# Altium PCB 2_RPi.PcbDoc (part 2 of 2)
Units mm, origin at the board's own origin, x right, y up, seen from the top; angles counter-clockwise.
Board outline 85.1 x 56 mm, 4 copper layers (Top Copper, Signal Layer 1, Signal Layer 2, Bottom Copper), stack 1.572 mm thick; 87 components, 122 nets, 420 pads, 307 vias.
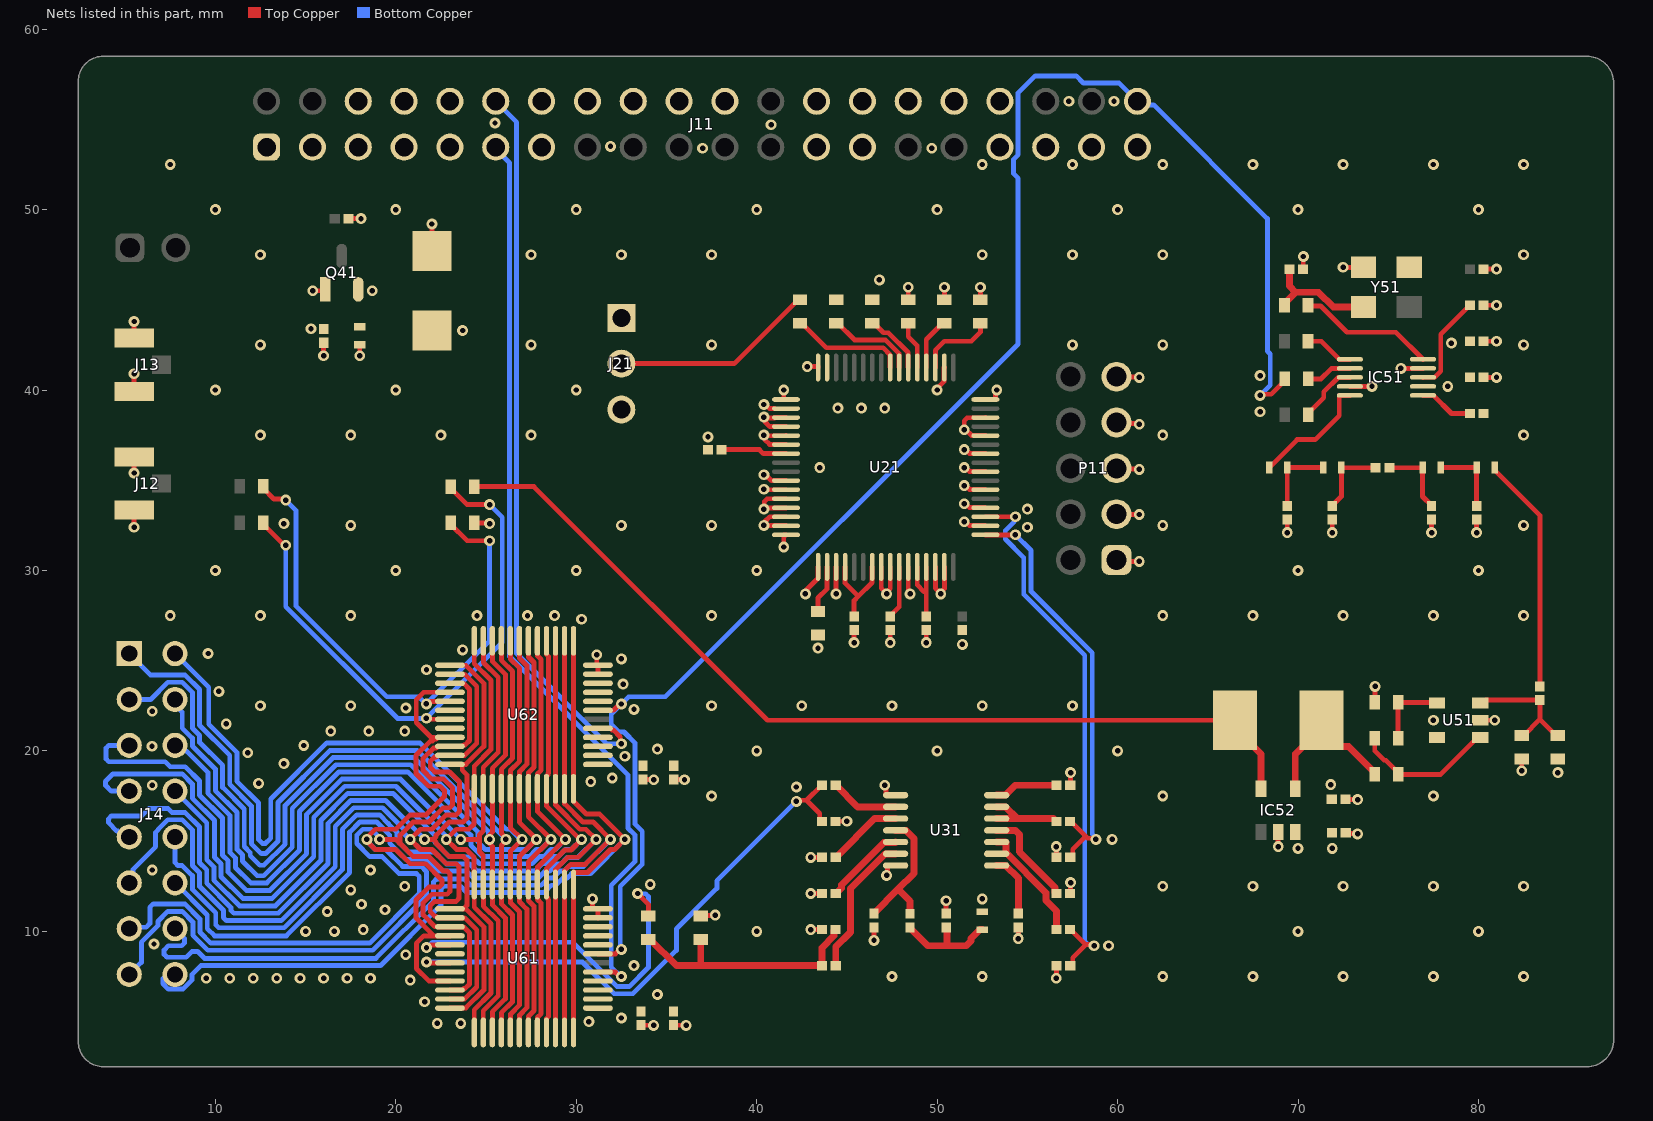
[diagram p4: the nets of this part, all layers, seen from the top]

## Via types
v1: diameter 0.6, hole 0.3, Top Copper to Bottom Copper, tented both sides, 307 vias

## Nets (pads, with @x,y where several pads share a name; then routed paths per layer and width w, separated by ;. In a path a pad name is that pad's centre, name@x,y a point inside that pad or via, vN(x,y) a via of type N, cw(c..) or ccw(c..) an arc to the next point about the centre after c; other vN are vias at no path point) (continued)
GND: C201.1 C202.1 C203.1 C301.1 C302.1 C304.1 C305.1 C306.2 C307.2 C308.1 C309.1 C401.2 C402.2 C403.1 C502.1 C503.1 C504.1 C505.1 C506.1 C507.2 C509.2 C510.1 C511.2 C513.2 C514.2 C601.2 C602.1 C603.2 C604.1 D41.2 IC51.4 IC51.9 IC52.2 J11.6 J11.9 J11.14 J11.20 J11.25 J11.30 J11.34 J11.39 J12.2 J12.3 J13.2 J13.3 J21.3 P11.1 P11.3 P11.5 P11.7 P11.9 Q41.1 R104.2 R105.1 R205.2 R206.2 R207.2 R302.1 R305.1 R306.2 R505.1 R508.1 U21.2 U21.16 U21.17 U21.18 U21.19 U21.20 U21.21 U21.22 U21.26 U21.27 U21.28 U21.29 U21.30 U21.31 U21.32 U21.33 U21.35 U21.40 U21.41 U21.43 U21.46 U21.47 U21.50 U21.52 U21.54 U21.56 U21.58 U21.60 U21.62 U21.64 U31.1 U31.7 U51.2 U61.23 U61.24 U62.23 U62.24 Y51.2 | length 88.9
  Top Copper w0.27: J12.3@5.499,33.343 5.5,33.342 v1(5.5,32.4) ; J12.2@5.499,36.293 J12.2@5.499,36.293 v1(5.5,35.4) ; J13.3@5.5,39.925 v1(5.5,40.9) ; J13.2@5.5,42.875 v1(5.5,43.8) ; v1(15.4,45.5) 16.012,45.5 Q41.1@16.085,45.573 ; v1(16,41.9) C402.2@16,42.62 ; C401.2@17.38,49.5 C401.2@17.38,49.5 18,49.501 v1@18.002,49.503 ; v1(18,41.9) C403.1@18,42.5 ; D41.2@22,47.7 v1(22,49.2) ; R105.1@24.35,32.65 24.375,32.625 25.175,32.625 v1(25.2,32.6) ; v1(30.9,11.8) 30.9,11.264 30.914,11.25 U61.24@31.2,11.25 U61.23@31.2,10.75 ; v1(31.138,25.325) 31.138,24.764 31.152,24.75 U62.24@31.2,24.75 U62.23@31.2,24.25 ; C604.1@33.59,4.81 33.6,4.8 34.28,4.8 v1(34.29,4.79) ; C602.1@33.7,18.42 33.71,18.41 34.29,18.41 v1(34.3,18.4) ; C603.2@35.39,4.81 35.4,4.8 36.08,4.8 v1(36.09,4.79) ; C601.2@35.4,18.42 35.41,18.41 35.99,18.41 v1(36,18.4) ; R104.2@36.9,10.85 36.925,10.875 37.675,10.875 v1(37.7,10.9) ; v1(40.4,34.5) 40.425,34.475 U21.27@41.625,34.475 ; v1(40.4,35.3) 40.489,35.3 40.804,34.985 41.615,34.985 U21.26@41.625,34.975 ; v1(40.4,39.2) 40.489,39.2 40.704,38.985 U21.18@40.985,38.985 ; v1(41.5,31.3) 41.5,31.965 41.51,31.975 U21.32@41.625,31.975 ; v1(41.5,40) 41.5,39.485 41.51,39.475 U21.17@41.625,39.475 ; U21.31@41.625,32.475 41.615,32.485 40.415,32.485 v1(40.4,32.5) 40.463,32.563 40.463,32.713 40.725,32.975 U21.30@41.625,32.975 ; U21.29@41.625,33.475 41.615,33.465 40.554,33.465 40.489,33.4 v1(40.4,33.4) 40.422,33.422 40.422,33.817 40.581,33.975 U21.28@41.625,33.975 ; U21.22@41.625,36.975 41.615,36.985 40.715,36.985 40.445,37.255 40.445,37.455 v1(40.4,37.5) 40.435,37.465 41.615,37.465 U21.21@41.625,37.475 ; U21.20@41.625,37.975 40.725,37.975 40.445,38.255 40.445,38.455 v1(40.4,38.5) 40.455,38.445 40.985,38.445 40.985,38.465 40.995,38.475 U21.19@41.625,38.475 ; v1(42.7,28.7) 42.763,28.763 42.763,28.933 43.4,29.57 U21.33@43.4,30.2 ; v1(42.8,41.3) 43.39,41.3 43.4,41.29 U21.16@43.4,41.25 ; v1(43,10.1) R306.2@43.625,10.1 ; v1(43,12.1) C307.2@43.62,12.1 ; v1(43,14.1) C306.2@43.62,14.1 ; R302.1@44.375,16.1 v1(45,16.1) ; v1(44.4,28.7) U21.35@44.4,30.2 ; v1(45.4,26) C201.1@45.4,26.7 ; v1(46.5,9.5) C302.1@46.5,10.22 ; U21.40@46.9,30.2 46.9,29.02 v1@47.2,28.72 ; v1(47.1,18.1) 47.163,18.037 47.163,17.587 47.2,17.55 U31.1@47.7,17.55 ; v1(47.2,13.1) 47.255,13.155 47.255,13.613 47.292,13.65 U31.7@47.7,13.65 ; v1(47.2,28.7) v1@47.2,28.72 ; v1(47.4,26) C203.1@47.4,26.7 ; U21.41@47.4,30.2 47.4,28.989 47.2,28.789 v1@47.2,28.72 ; U21.43@48.4,30.2 48.4,28.889 48.5,28.789 v1(48.5,28.7) ; R205.2@48.4,45 v1(48.4,45.7) ; v1(49.4,26) C202.1@49.4,26.7 ; U21.46@49.9,30.2 49.9,29.02 v1@50.2,28.72 ; v1(50,40) 50,40.089 50.39,40.479 50.39,41.24 U21.2@50.4,41.25 ; v1(50.2,28.7) v1@50.2,28.72 ; U21.47@50.4,30.2 50.4,28.989 50.2,28.789 v1@50.2,28.72 ; R206.2@50.4,45 v1(50.4,45.7) ; C301.1@50.5,10.98 v1(50.5,11.7) ; v1(51.5,32.7) 51.589,32.7 51.804,32.485 52.665,32.485 U21.50@52.675,32.475 ; v1(51.5,33.7) 51.589,33.7 51.804,33.485 52.665,33.485 U21.52@52.675,33.475 ; v1(51.5,34.7) 51.589,34.7 51.804,34.485 52.665,34.485 U21.54@52.675,34.475 ; v1(51.5,35.7) 51.589,35.7 51.804,35.485 52.665,35.485 U21.56@52.675,35.475 ; v1(51.5,36.7) 51.589,36.7 51.804,36.485 52.665,36.485 U21.58@52.675,36.475 ; R207.2@52.4,45 v1(52.4,45.7) ; U21.60@52.675,37.475 52.665,37.485 51.904,37.485 51.589,37.8 v1(51.5,37.8) 51.5,38.3 51.665,38.465 52.665,38.465 U21.62@52.675,38.475 ; U21.64@52.675,39.475 53.235,39.475 53.245,39.485 53.245,39.945 v1(53.3,40) ; v1(54.5,9.6) C309.1@54.5,10.22 ; v1(56.6,7.4) 56.61,7.41 56.61,8.09 C308.1@56.62,8.1 ; v1(56.6,14.7) 56.61,14.69 56.61,14.11 C305.1@56.62,14.1 ; R305.1@57.375,12.1 57.387,12.113 57.387,12.687 v1(57.4,12.7) ; C304.1@57.38,18.1 57.39,18.11 57.39,18.79 v1(57.4,18.8) ; P11.1@59.94,30.58 60.02,30.5 v1(61.2,30.5) ; P11.3@59.94,33.12 59.95,33.11 61.19,33.11 v1(61.2,33.1) ; P11.5@59.94,35.66 59.97,35.63 61.17,35.63 v1(61.2,35.6) ; P11.7@59.94,38.2 59.99,38.15 61.15,38.15 v1(61.2,38.1) ; P11.9@59.94,40.74 59.96,40.72 61.18,40.72 v1(61.2,40.7) ; v1(68.9,14.7) IC52.2@68.9,15.5 ; v1(69.4,32.1) C507.2@69.4,32.82 ; C506.1@70.28,46.7 70.29,46.71 70.29,47.39 v1(70.3,47.4) ; v1(71.9,32.1) C509.2@71.9,32.82 ; v1(72.5,46.8) Y51.2@73.63,46.8 ; C513.2@72.628,17.322 72.639,17.311 73.289,17.311 v1(73.3,17.3) ; C514.2@72.645,15.465 72.678,15.433 73.267,15.433 v1(73.3,15.4) ; IC51.9@72.875,40.2 v1(74.1,40.2) ; R505.1@74.25,22.7 74.275,22.725 v1(74.275,23.575) ; v1(75.7,41.2) IC51.4@76.925,41.2 ; v1(77.4,32.1) C510.1@77.4,32.82 ; v1(79.9,32.1) C511.2@79.9,32.82 ; U51.2@80.1,21.7 v1(80.9,21.7) ; C503.1@80.28,40.7 v1(81,40.7) ; C504.1@80.28,42.7 v1(81,42.7) ; C502.1@80.28,44.7 v1(81,44.7) ; C505.1@80.28,46.7 v1(81,46.7) ; v1(82.4,18.9) R508.1@82.4,19.55
  other v1: 22.3,4.9 23.6,4.9 30.7,5 21.6,6.1 20.8,7.3 9.5,7.4 10.8,7.4 12.1,7.4 13.4,7.4 14.7,7.4 16,7.4 17.3,7.4 18.6,7.4 47.5,7.5 52.5,7.5 62.5,7.5 67.5,7.5 72.5,7.5 77.5,7.5 82.5,7.5 33.2,8.1 20.554,8.706 59.5,9.2 6.6,9.3 15,10 16.6,10 18.2,10.1 16.2,11.1 19.4,11.2 17.5,12.3 20.5,12.5 62.5,12.5 67.5,12.5 72.5,12.5 77.5,12.5 82.5,12.5 34.1,12.6 6.5,13.4 18.6,13.4 59.7,15.1 37.5,17.5 62.5,17.5 77.5,17.5 42.2,18 6.5,18.1 12.4,18.2 30.8,18.3 13.8,19.3 32.7,19.7 11.8,19.9 6.488,20.254 14.9,20.3 16.4,21.1 18.5,21.1 20.5,21.1 10.6,21.5 6.5,22.2 33.2,22.3 20.557,22.38 12.5,22.5 17.5,22.5 37.5,22.5 42.5,22.5 47.5,22.5 52.5,22.5 57.5,22.5 10.2,23.3 32.6,23.7 21.7,24.5 32.5,25.1 9.6,25.4 23.7,25.6 30.3,27.3 7.5,27.5 12.5,27.5 17.5,27.5 24.5,27.5 27.3,27.5 28.8,27.5 37.5,27.5 62.5,27.5 67.5,27.5 72.5,27.5 77.5,27.5 82.5,27.5 55,32.4 17.5,32.5 32.5,32.5 37.5,32.5 62.5,32.5 82.5,32.5 13.8,32.6 55,33.4 43.5,35.7 12.5,37.5 17.5,37.5 22.5,37.5 27.5,37.5 62.5,37.5 82.5,37.5 67.9,38.8 44.5,39 45.8,39 47.1,39 67.9,40.8 12.5,42.5 27.5,42.5 37.5,42.5 57.5,42.5 62.5,42.5 82.5,42.5 12.5,47.5 27.5,47.5 32.5,47.5 37.5,47.5 52.5,47.5 57.5,47.5 62.5,47.5 82.5,47.5 18.074,49.503 7.5,52.5 52.5,52.5 57.5,52.5 62.5,52.5 67.5,52.5 72.5,52.5 77.5,52.5 82.5,52.5 37,53.4 49.7,53.4 31.9,53.5 40.8,54.7 25.5,54.8 57.3,56 59.8,56
MUX_SCLK: J11.40 R502.1 U61.19 U62.19 | length 91.9
  Top Copper w0.27: U61.19@31.2,8.75 31.206,8.756 32.166,8.756 32.411,9 v1(32.5,9) ; U62.19@31.2,22.25 31.206,22.256 32.066,22.256 32.411,22.6 v1(32.5,22.6) ; v1(67.9,39.7) 67.963,39.763 68.512,39.763 69.267,40.518 R502.1@69.267,40.618
  Bottom Copper w0.27: v1(32.5,9) 32.441,9.059 32.441,12.497 33.659,13.715 33.659,15.541 33.262,15.938 33.262,20.433 32.645,21.05 32.355,21.05 31.938,21.467 31.938,22.038 32.9,23 34.944,23 54.492,42.548 54.492,51.736 54.236,51.991 54.236,52.785 54.492,53.041 54.492,56.465 55.436,57.409 57.712,57.409 58.109,57.012 60.088,57.012 J11.40@61.1,56 61.297,55.803 61.997,55.803 68.3,49.5 68.3,42.16 68.462,41.998 68.462,40.262 v1(67.9,39.7)
N_IN: R105.2 R106.2 U62.41 | length 31.6
  Top Copper w0.27: R106.2@12.655,34.656 12.655,34.556 13.248,33.963 13.837,33.963 v1(13.9,33.9) ; v1(21.694,22.606) 21.784,22.606 21.922,22.744 22.994,22.744 U62.41@23,22.75 ; R105.2@23.05,32.55 23.95,31.65 v1(25.2,31.65)
  Bottom Copper w0.27: v1(13.9,33.9) 14.462,33.338 14.462,31.633 14.462,31.167 14.462,28.038 19.5,23 21.271,23 21.665,22.606 v1(21.694,22.606) 25.2,26.111 v1(25.2,31.65)
N_OUT: R103.1 U61.41 | length 21.3
  Top Copper w0.27: v1(21.7,9.1) 21.789,9.1 21.934,9.244 22.994,9.244 U61.41@23,9.25 ; v1(33.4,12.1) 34,11.5 R103.1@34,10.85
  Bottom Copper w0.27: v1(21.7,9.1) 21.723,9.1 22.023,9.4 29.805,9.4 32.267,6.938 32.938,6.938 34,8 34,11.927 33.842,12.085 33.415,12.085 v1(33.4,12.1)
NetC301_2: C301.2 L301.1 R301.2 | length 5.9
  Top Copper w0.381: R301.2@48.502,10.223 R301.2@48.5,10.225 48.5,10.2 49.5,9.2 50.55,9.2 ; C301.2@50.5,10.22 50.55,10.17 50.55,9.2 ; L301.1@52.5,10.1 52.371,10.1 51.869,9.598 51.869,9.469 51.6,9.2 50.55,9.2
NetC302_2: C302.2 R301.1 U31.4 | length 7.9
  Top Copper w0.381: C302.2@46.5,10.98 46.5,11 47.836,12.336 ; U31.4@47.7,15.6 47.715,15.585 48.287,15.585 48.717,15.154 48.717,13.218 47.836,12.336 ; R301.1@48.5,10.975 48.5,11.671 47.836,12.336
NetC303_2: C303.2 U31.2 | length 3.8
  Top Copper w0.381: C303.2@44.38,18.1 44.4,18.1 45.6,16.9 U31.2@47.7,16.9
NetC304_2: C304.2 U31.14 | length 3.5
  Top Copper w0.381: U31.14@53.3,17.55 53.794,17.55 54.344,18.1 C304.2@56.62,18.1
NetC306_1: C306.1 U31.3 | length 4.2
  Top Copper w0.381: C306.1@44.38,14.1 44.4,14.1 45.5,15.2 45.5,15.22 46.53,16.25 U31.3@47.7,16.25
NetC307_1: C307.1 U31.5 | length 4.6
  Top Copper w0.381: C307.1@44.38,12.1 44.4,12.1 44.692,12.392 44.692,12.582 47.045,14.935 47.684,14.935 U31.5@47.7,14.95
NetC309_2: C309.2 U31.8 | length 3.5
  Top Copper w0.381: U31.8@53.3,13.65 53.794,13.65 54.5,12.944 C309.2@54.5,10.98
NetC310_1: C310.1 U31.6 | length 7.9
  Top Copper w0.381: C310.1@44.38,8.1 44.38,9.131 45.2,9.951 45.2,12.372 47.113,14.285 47.684,14.285 U31.6@47.7,14.3
NetC310_2: C310.2 R103.2 R104.1 R306.1 | length 14
  Top Copper w0.381: R103.2@34,9.55 34.1,9.55 35.55,8.1 36.9,8.1 ; R104.1@36.9,9.55 36.9,8.1 ; R306.1@44.375,10.1 44.35,10.1 44.29,10.041 44.29,9.76 43.62,9.089 C310.2@43.62,8.1 36.9,8.1
NetC501_2: C501.2 IC51.1 | length 3
  Top Copper w0.27: IC51.1@76.925,39.7 77.505,39.7 78.505,38.7 C501.2@79.52,38.7
NetC502_2: C502.2 IC51.3 | length 5.5
  Top Copper w0.27: IC51.3@76.925,40.7 76.935,40.71 77.582,40.71 77.912,41.04 77.912,43.092 79.375,44.555 79.375,44.575 79.5,44.7 C502.2@79.52,44.7
NetC506_2: C506.2 R504.1 Y51.3 | length 6.5
  Top Copper w0.381: R504.1@69.25,44.7 69.25,44.8 69.867,45.418 ; C506.2@69.52,46.7 69.52,45.765 69.867,45.418 ; Y51.3@73.63,44.6 71.953,44.6 71.135,45.418 69.867,45.418
NetC507_1: C507.1 L501.1 L502.1 | length 4.1
  Top Copper w0.27: C507.1@69.4,33.58 L501.1@69.4,35.7 L502.1@71.4,35.7
NetC508_1: C508.1 C510.2 L503.1 | length 4.2
  Top Copper w0.27: C508.1@75.061,35.691 75.065,35.695 76.895,35.695 L503.1@76.9,35.7 76.9,34.1 77.4,33.6 C510.2@77.4,33.58
NetC508_2: C508.2 C509.1 L502.2 | length 4.2
  Top Copper w0.27: C509.1@71.9,33.58 71.9,33.6 72.4,34.1 L502.2@72.4,35.7 72.405,35.695 74.296,35.695 C508.2@74.301,35.691
NetC511_1: C511.1 L503.2 L504.1 | length 4.1
  Top Copper w0.27: L503.2@77.9,35.7 L504.1@79.9,35.7 C511.1@79.9,33.58
NetC512_1: C512.1 R507.1 R508.2 U51.3 | length 7.2
  Top Copper w0.27: U51.3@80.1,22.65 80.25,22.65 80.42,22.82 C512.1@83.4,22.82 83.4,21.75 ; R508.2@82.4,20.85 82.5,20.85 83.4,21.75 ; R507.1@84.4,20.85 84.3,20.85 83.4,21.75
NetC512_2: C512.2 L504.2 | length 13.2
  Top Copper w0.27: L504.2@80.9,35.7 80.9,35.55 83.4,33.05 C512.2@83.4,23.58
NetIC51_5: IC51.5 R504.2 | length 7.6
  Top Copper w0.27: R504.2@70.55,44.7 70.592,44.658 71.255,44.658 72.713,43.2 75.425,43.2 IC51.5@76.925,41.7
NetIC51_6: IC51.6 R503.2 | length 2.7
  Top Copper w0.27: R503.2@70.55,42.7 71.295,42.7 72.295,41.7 IC51.6@72.875,41.7
NetIC51_7: IC51.7 R502.2 | length 2.5
  Top Copper w0.27: R502.2@70.567,40.618 71.272,40.618 71.844,41.19 72.865,41.19 IC51.7@72.875,41.2
NetIC51_8: IC51.8 R501.2 | length 3.4
  Top Copper w0.27: R501.2@70.567,38.618 70.567,38.718 71.423,39.575 71.423,39.895 72.218,40.69 72.865,40.69 IC51.8@72.875,40.7
NetIC51_10: IC51.10 L501.2 | length 6.9
  Top Copper w0.27: L501.2@68.4,35.85 L501.2@68.4,35.7 69.952,37.252 70.952,37.252 72.285,38.585 72.285,39.69 72.295,39.7 IC51.10@72.875,39.7
NetIC52_4: IC52.4 R509.2 RS51.1 | length 8.5
  Top Copper w0.381: IC52.4@69.85,17.9 69.85,19.825 RS51.1@71.3,21.275 ; RS51.1@71.3,21.7 RS51.1@71.3,21.275 ; R509.2@74.25,18.7 74.25,18.8 72.81,20.24 72.335,20.24 RS51.1@71.3,21.275
NetIC52_5: IC52.5 R101.1 RS51.2 | length 52
  Top Copper w0.27: R101.1@24.35,34.75 R101.1@24.35,34.65 27.65,34.65 40.6,21.7 RS51.2@66.5,21.7
  Top Copper w0.381: RS51.2@66.5,21.7 66.5,21.275 67.95,19.825 IC52.5@67.95,17.9
NetJ11_1: J11.1
NetJ11_3: J11.3
NetJ11_5: J11.5
NetJ11_7: J11.7
NetJ11_8: J11.8
NetJ11_10: J11.10
NetJ11_13: J11.13
NetJ11_16: J11.16
NetJ11_18: J11.18
NetJ11_22: J11.22
NetJ11_26: J11.26
NetJ11_27: J11.27
NetJ11_28: J11.28
NetJ11_32: J11.32
NetJ11_33: J11.33
NetJ11_35: J11.35
NetJ11_37: J11.37
NetR203_1: R203.1 U21.8 | length 6.4
  Top Copper w0.27: R203.1@42.4,43.7 42.5,43.7 43.856,42.344 47.003,42.344 47.39,41.957 47.39,41.26 U21.8@47.4,41.25
NetR303_1: R303.1 U31.12 U31.13 | length 4.8
  Top Copper w0.381: U31.12@53.3,16.25 54.444,16.25 ; U31.13@53.3,16.9 53.794,16.9 54.444,16.25 ; R303.1@56.625,16.1 56.6,16.1 56.45,16.25 54.444,16.25
NetR304_1: R304.1 U31.9 U31.10 | length 6.5
  Top Copper w0.381: U31.10@53.3,14.95 53.794,14.95 53.809,14.935 53.809,14.362 56.032,12.139 56.032,11.718 56.625,11.126 R304.1@56.625,10.1
NetR305_2: R305.2 U31.11 | length 5.5
  Top Copper w0.381: U31.11@53.3,15.6 54.348,15.6 54.571,15.377 54.571,14.41 56.54,12.441 56.54,12.16 56.6,12.1 R305.2@56.625,12.1
NetR505_2: R505.2 R506.1 U51.4 | length 4.2
  Top Copper w0.27: R506.1@75.55,20.7 R505.2@75.55,22.7 75.575,22.675 77.675,22.675 U51.4@77.7,22.65
NetR506_2: R506.2 R509.1 U51.1 | length 8
  Top Copper w0.27: R506.2@74.25,20.7 74.25,20 74.767,19.483 74.868,19.483 75.55,18.8 R509.1@75.55,18.7 77.9,18.7 79.95,20.75 U51.1@80.1,20.75
NetU21_15: U21.15
NetU61_15: U61.15
NetU61_16: U61.16
NetU61_20: U61.20
NetU61_21: U61.21
NetU61_22: U61.22
NetU61_42: U61.42
NetU61_44: U61.44
NetU62_15: U62.15
NetU62_16: U62.16
NetU62_20: U62.20
NetU62_21: U62.21
NetU62_22: U62.22
NetU62_42: U62.42
NetU62_44: U62.44
NetY51_1: Y51.1
OS0: R207.1 U21.3 | length 4.4
  Top Copper w0.27: U21.3@49.9,41.25 49.9,42.2 50.4,42.7 51.9,42.7 52.4,43.2 R207.1@52.4,43.7
OS1: R206.1 U21.4 | length 2.9
  Top Copper w0.27: U21.4@49.4,41.25 49.4,42.8 50.3,43.7 R206.1@50.4,43.7
OS2: R205.1 U21.5 | length 2.7
  Top Copper w0.27: R205.1@48.4,43.7 48.4,42.957 48.9,42.457 U21.5@48.9,41.25
P_IN: R101.2 R102.2 U62.43 | length 33.3
  Top Copper w0.27: R102.2@12.655,32.656 12.655,32.556 13.811,31.4 v1(13.9,31.4) ; v1(21.694,21.806) 21.744,21.756 22.994,21.756 U62.43@23,21.75 ; R101.2@23.05,34.55 23.95,33.65 v1(25.2,33.65)
  Bottom Copper w0.27: v1(13.9,31.4) 13.9,28 20.094,21.806 v1(21.694,21.806) 25.9,26.011 25.9,32.95 v1(25.2,33.65)
P_OUT: C303.1 R302.2 U61.43 | length 31.2
  Top Copper w0.27: v1(21.7,8.3) 21.744,8.256 22.994,8.256 U61.43@23,8.25 ; v1(42.2,17.2) 42.263,17.263 42.763,17.263 ; C303.1@43.62,18.1 43.6,18.1 42.763,17.263 ; R302.2@43.625,16.1 43.612,16.1 43.497,16.215 43.497,16.53 42.763,17.263
  Bottom Copper w0.27: v1(21.7,8.3) 30.344,8.3 32.103,6.541 33.141,6.541 35.548,8.948 35.548,10.13 37.798,12.38 37.798,12.798 v1(42.2,17.2)
RANGE: J21.2 R203.2 | length 11.4
  Top Copper w0.27: J21.2@32.5,41.46 38.76,41.46 42.3,45 R203.2@42.4,45
"REF IN/OUT": C203.2 U21.42 | length 2.9
  Top Copper w0.27: C203.2@47.4,27.46 47.4,27.48 47.9,27.98 U21.42@47.9,30.2
"REF SEL": R204.2 U21.34 | length 2.7
  Top Copper w0.27: R204.2@43.4,27.73 43.4,28.482 43.9,28.982 U21.34@43.9,30.2
REFCAPx: C202.2 U21.44 U21.45 | length 4.4
  Top Copper w0.27: U21.44@48.9,30.2 48.9,29.2 49.27,28.83 49.4,28.83 ; C202.2@49.4,27.46 49.4,28.83 ; U21.45@49.4,30.2 49.4,28.83
REGCAP: C201.2 U21.36 U21.39 | length 5.1
  Top Copper w0.27: U21.36@44.9,30.2 44.9,29.3 45.631,28.569 ; C201.2@45.4,27.46 45.4,28.337 45.631,28.569 ; U21.39@46.4,30.2 46.39,30.19 46.39,29.327 45.631,28.569
S1: J14.16 U61.12 U61.25 U62.12 U62.25 | length 56.5
  Top Copper w0.27: U61.12@29.85,4.4 U61.25@29.85,12.575 ; U61.25@29.85,12.6 29.85,13.247 29.864,13.261 30.624,13.261 31.901,14.538 32.133,14.538 32.695,15.1 v1(32.7,15.1) 31.3,16.5 30.568,16.5 29.85,17.218 U62.12@29.85,17.9 U62.25@29.85,26.1
  Bottom Copper w0.27: J14.16@7.998,7.61 J14.16@7.77,7.61 7.56,7.4 7.1,7.4 7.1,7.1 7.4,6.8 8.2,6.8 8.7,7.3 8.7,7.6 9.2,8.1 19.153,8.1 22.5,11.447 22.5,12.342 22.658,12.5 23.6,12.5 23.944,12.156 28.219,12.156 28.616,12.553 28.855,12.553 29.252,12.95 29.491,12.95 29.741,13.2 30.8,13.2 v1(32.7,15.1)
S2: J14.14 U61.11 U61.26 U62.11 U62.26 | length 55.9
  Top Copper w0.27: U61.11@29.35,4.4 U61.26@29.35,12.6 29.356,12.606 29.356,13.377 29.693,13.714 30.508,13.714 v1@31.895,15.1 ; U62.26@29.35,26.1 U62.11@29.35,17.9 29.356,17.894 29.356,17.062 30.359,16.059 30.936,16.059 v1@31.895,15.1 ; v1(31.9,15.1) v1@31.895,15.1
  Bottom Copper w0.27: J14.14@7.77,10.15 7.77,10.13 8.3,9.6 8.3,9.358 8.142,9.2 7.4,9.2 7.162,8.962 7.162,8.725 7.32,8.567 8.39,8.567 8.712,8.888 9.012,8.888 9.4,8.5 18.9,8.5 22.1,11.7 22.1,12.742 22.258,12.9 23.798,12.9 24.145,12.553 28.055,12.553 28.452,12.95 28.691,12.95 29.088,13.347 29.326,13.347 29.579,13.6 30.4,13.6 v1(31.9,15.1)
S3: J14.12 U61.10 U61.27 U62.10 U62.27 | length 55.5
  Top Copper w0.27: U61.10@28.85,4.4 28.851,4.401 28.851,12.599 U61.27@28.85,12.6 28.856,12.606 28.856,13.438 29.528,14.111 30.111,14.111 v1(31.1,15.1) 30.538,15.662 30.194,15.662 28.856,17 28.856,17.894 U62.10@28.85,17.9 28.851,17.901 28.851,26.099 U62.27@28.85,26.1
  Bottom Copper w0.27: J14.12@7.77,12.69 9.552,10.908 9.552,10.153 9.956,9.749 13.936,9.749 17.441,13.254 17.441,15.497 18.003,16.059 18.936,16.059 19.662,15.333 19.662,14.882 20.547,13.997 21.629,13.997 22.286,13.34 23.92,13.34 24.309,12.95 27.891,12.95 28.288,13.347 28.526,13.347 28.923,13.744 29.162,13.744 29.518,14.1 30.1,14.1 v1(31.1,15.1)
S4: J14.10 U61.9 U61.28 U62.9 U62.28 | length 56.2
  Top Copper w0.27: U61.9@28.35,4.4 28.356,4.406 28.356,5.172 28.454,5.27 28.454,11.738 28.438,11.754 28.438,11.829 28.35,11.917 U61.28@28.35,12.6 28.356,12.606 28.356,13.5 29.364,14.508 29.708,14.508 v1(30.3,15.1) 30.237,15.163 30.132,15.163 28.356,16.939 28.356,17.894 U62.9@28.35,17.9 28.35,18.583 28.438,18.671 28.438,18.754 28.454,18.77 28.454,25.23 28.356,25.328 28.356,26.094 U62.28@28.35,26.1
  Bottom Copper w0.27: J14.10@7.77,15.23 7.77,13.805 7.928,13.647 8.166,13.647 8.727,13.086 8.727,12.328 10.022,11.032 10.022,10.358 10.18,10.2 13.818,10.2 17.044,13.426 17.044,15.662 17.838,16.456 19.1,16.456 19.587,15.969 20.059,15.497 20.059,15.046 20.711,14.394 22.15,14.394 22.807,13.737 24.084,13.737 24.474,13.347 27.726,13.347 28.123,13.744 28.362,13.744 28.759,14.141 28.997,14.141 29.394,14.538 29.738,14.538 v1(30.3,15.1)
S5: J14.8 U61.8 U61.29 U62.8 U62.29 | length 55.5
  Top Copper w0.27: U61.8@27.85,4.4 27.856,4.406 27.856,5.234 28.057,5.435 28.057,11.565 27.856,11.766 27.856,12.594 U61.29@27.85,12.6 27.856,12.606 27.856,13.561 29.395,15.1 v1(29.4,15.1) 27.85,16.65 U62.8@27.85,17.9 27.856,17.906 27.856,18.734 28.057,18.935 28.057,25.065 27.856,25.266 27.856,26.094 U62.29@27.85,26.1
  Bottom Copper w0.27: J14.8@7.77,17.77 9.52,16.02 9.52,13.977 9.917,13.58 9.917,12.838 11.34,11.415 13.334,11.415 15.853,13.934 15.853,16.155 17.345,17.647 19.848,17.647 22.162,15.333 22.162,14.943 22.971,14.134 24.248,14.134 24.638,13.744 27.562,13.744 27.959,14.141 28.197,14.141 28.594,14.538 28.833,14.538 29.395,15.1 v1(29.4,15.1)
S6: J14.6 U61.7 U61.30 U62.7 U62.30 | length 55.9
  Top Copper w0.27: U61.7@27.35,4.4 27.356,4.406 27.356,5.295 27.66,5.599 27.66,11.401 27.356,11.705 27.356,12.594 U61.30@27.35,12.6 27.35,13.85 v1(28.6,15.1) 27.35,16.35 U62.7@27.35,17.9 27.356,17.906 27.356,18.795 27.66,19.099 27.66,24.901 27.356,25.205 27.356,26.094 U62.30@27.35,26.1
  Bottom Copper w0.27: J14.6@7.77,20.31 8.073,20.31 8.42,19.963 8.437,19.963 9.588,18.812 9.588,17.651 10.802,16.436 10.802,14.379 11.108,14.073 11.108,13.54 11.965,12.684 12.853,12.684 14.662,14.493 14.662,16.648 16.852,18.838 20.657,18.838 24.162,15.333 24.162,14.782 24.803,14.141 27.397,14.141 27.794,14.538 28.033,14.538 28.595,15.1 v1(28.6,15.1)
S7: J14.4 U61.6 U61.31 U62.6 U62.31 | length 56.6
  Top Copper w0.27: U61.6@26.85,4.4 26.856,4.406 26.856,5.357 27.263,5.764 27.263,11.236 26.856,11.643 26.856,12.594 U61.31@26.85,12.6 26.85,14.15 v1(27.8,15.1) 26.85,16.05 U62.6@26.85,17.9 26.856,17.906 26.856,18.857 27.263,19.264 27.263,24.736 26.856,25.143 26.856,26.094 U62.31@26.85,26.1
  Bottom Copper w0.27: J14.4@7.77,22.85 7.77,22.547 8.166,22.151 8.166,21.267 8.727,20.706 8.727,20.274 10,19 10,17.8 11.2,16.6 11.2,14.543 11.505,14.237 11.505,13.891 12.312,13.084 12.679,13.084 14.265,14.67 14.265,16.813 16.687,19.235 20.821,19.235 24.559,15.497 24.559,14.946 24.967,14.538 27.233,14.538 27.795,15.1 v1(27.8,15.1)
S8: J14.2 U61.5 U61.32 U62.5 U62.32 | length 55.7
  Top Copper w0.27: U61.5@26.35,4.4 26.356,4.406 26.356,5.418 26.866,5.928 26.866,11.072 26.356,11.582 26.356,12.594 U61.32@26.35,12.6 ; U61.32@26.35,12.611 26.35,14.45 26.892,14.992 v1@26.892,15.097 ; U62.32@26.35,26.1 26.356,26.094 26.356,25.082 26.866,24.572 26.866,19.428 26.356,18.918 26.356,17.906 U62.5@26.35,17.9 26.35,15.75 v1(27,15.1)
  Bottom Copper w0.27: J14.2@7.77,25.39 9.638,23.522 9.638,21.479 11.194,19.923 11.194,18.317 12.397,17.114 12.397,15.079 12.603,14.873 12.779,14.873 13.071,15.164 13.071,17.336 16.178,20.443 21.338,20.443 26.119,15.662 26.333,15.662 26.73,15.265 26.746,15.265 26.911,15.1 v1(27,15.1)
S9: J14.1 U61.4 U61.33 U62.4 U62.33 | length 57.4
  Top Copper w0.27: U61.4@25.85,4.4 25.856,4.406 25.856,5.479 26.469,6.093 26.469,10.907 25.856,11.521 25.856,12.594 U61.33@25.85,12.6 25.85,14.761 26.1,15.011 v1(26.1,15.1) 26.1,15.189 25.85,15.439 U62.4@25.85,17.9 25.85,18.974 26.469,19.593 26.469,24.407 25.85,25.026 U62.33@25.85,26.1
  Bottom Copper w0.27: J14.1@5.23,25.39 6.416,24.204 8.331,24.204 9.123,23.411 9.123,21.432 10.797,19.759 10.797,18.152 12,16.949 12,14.866 12.555,14.311 12.779,14.311 13.471,15.003 13.471,17.142 16.358,20.029 21.191,20.029 26.1,15.12 v1(26.1,15.1)
S10: J14.3 U61.3 U61.34 U62.3 U62.34 | length 57.1
  Top Copper w0.27: v1(25.2,15.1) v1@25.035,15.1 ; U61.3@25.35,4.4 25.356,4.406 25.356,5.541 26.072,6.257 26.072,10.743 25.35,11.465 U61.34@25.35,12.6 25.35,14.717 25.035,15.032 v1@25.035,15.1 ; U62.34@25.35,26.1 25.35,24.965 26.072,24.243 26.072,19.757 25.356,19.041 25.356,17.906 U62.3@25.35,17.9 25.35,15.502 25.035,15.187 v1@25.035,15.1
  Bottom Copper w0.27: J14.3@5.23,22.85 6.417,22.85 7.374,23.807 8.166,23.807 8.727,23.246 8.727,21.268 9.123,20.871 9.123,20.477 10.4,19.2 10.4,17.979 11.6,16.779 11.6,14.704 11.937,14.367 11.937,14.197 12.47,13.664 12.694,13.664 13.868,14.839 13.868,16.977 16.523,19.632 21.026,19.632 25.137,15.521 25.137,15.163 v1(25.2,15.1)
S11: J14.5 U61.2 U61.35 U62.2 U62.35 | length 55.5
  Top Copper w0.27: v1(23.6,15.1) 24.638,15.1 ; 24.629,15.342 24.85,15.563 U62.2@24.85,17.9 24.85,19.097 25.675,19.922 25.675,24.078 24.856,24.898 24.856,26.094 U62.35@24.85,26.1 ; 24.638,15.333 24.638,15.1 ; U61.2@24.85,4.4 24.85,5.597 25.675,6.422 25.675,10.578 24.856,11.398 24.856,12.594 U61.35@24.85,12.6 ; U61.35@24.85,13.283 24.85,14.205 24.638,14.417 24.638,15.1
  Bottom Copper w0.27: J14.5@5.23,20.31 4.103,20.31 3.945,20.152 3.945,19.558 4.103,19.4 7.216,19.4 7.492,19.124 8.331,19.124 9.123,18.331 9.123,17.554 10.395,16.282 10.395,14.225 10.711,13.908 10.711,13.278 11.716,12.274 13.031,12.274 15.059,14.301 15.059,16.484 17.016,18.441 20.259,18.441 v1(23.6,15.1)
S12: J14.7 U61.1 U61.36 U62.1 U62.36 | length 55.5
  Top Copper w0.27: v1(22.8,15.1) v1@22.805,15.1 ; U61.36@24.34,13.16 24.34,14.11 23.912,14.538 23.367,14.538 v1@22.805,15.1 ; U61.1@24.35,4.4 24.35,5.658 25.278,6.586 25.278,10.414 24.35,11.342 U61.36@24.35,12.6 ; U62.36@24.35,26.1 24.35,24.842 25.278,23.914 25.278,20.086 24.35,19.158 U62.1@24.35,17.9 24.34,17.89 24.34,15.949 24.053,15.662 23.362,15.662 22.805,15.105 v1@22.805,15.1
  Bottom Copper w0.27: J14.7@5.23,17.77 4.23,17.77 3.912,18.088 3.912,18.312 4.327,18.727 7.712,18.727 8.166,18.727 8.727,18.166 8.727,17.712 8.727,17.376 9.952,16.151 9.952,14.107 10.314,13.744 10.314,13.036 11.526,11.825 13.145,11.825 15.456,14.136 15.456,16.319 17.181,18.044 20.012,18.044 22.737,15.319 22.737,15.163 v1(22.8,15.1)
S13: J14.9 U61.37 U61.48 U62.37 U62.48 | length 55.6
  Top Copper w0.27: v1(21.6,15.1) 22.08,15.1 ; U61.48@23,5.75 23.006,5.756 23.886,5.756 24.881,6.75 24.881,10.25 23.886,11.244 U61.37@23.756,11.244 ; U61.37@23,11.25 23.006,11.256 23.756,11.256 23.938,11.438 23.938,13.951 23.748,14.141 22.964,14.141 22.238,14.867 22.238,14.942 22.08,15.1 ; U62.48@23,19.25 23.667,19.25 23.681,19.236 23.681,18.926 23.938,18.669 23.938,16.259 23.738,16.059 22.964,16.059 22.238,15.333 22.238,15.258 22.08,15.1 ; U62.37@23,24.75 23.006,24.744 23.886,24.744 24.881,23.75 24.881,20.25 23.886,19.256 U62.48@23.667,19.256
  Bottom Copper w0.27: J14.9@5.23,15.23 4.927,15.23 4.6,15.557 4.543,15.557 4.082,16.018 4.082,16.242 4.24,16.4 5.912,16.4 6.312,16.8 7.387,16.8 7.604,16.583 8.331,16.584 9.123,15.791 9.123,13.812 9.52,13.415 9.52,12.664 10.863,11.322 10.863,11.164 11.021,11.006 13.496,11.006 16.25,13.761 16.25,15.991 17.509,17.25 19.445,17.25 21.595,15.1 v1(21.6,15.1)
S14: J14.11 U61.38 U61.47 U62.38 U62.47 | length 57
  Top Copper w0.27: v1(20.8,15.1) v1@20.805,15.1 ; U61.47@23,6.25 23.006,6.256 23.825,6.256 24.484,6.915 24.484,10.085 23.825,10.744 23.006,10.744 U61.38@23,10.75 22.317,10.75 22.229,10.838 22.154,10.838 21.913,11.079 21.913,11.421 22.154,11.662 23.342,11.662 23.5,11.82 23.5,13.586 23.342,13.744 22.8,13.744 22.006,14.538 21.367,14.538 v1@20.805,15.1 ; U62.47@23,19.75 22.317,19.75 22.229,19.662 22.154,19.662 21.913,19.421 21.913,19.079 22.154,18.838 22.978,18.838 23.541,18.275 23.541,16.655 23.342,16.456 22.8,16.456 22.006,15.662 21.367,15.662 v1@20.805,15.1 ; U62.38@23,24.25 23.006,24.244 23.825,24.244 24.484,23.585 24.484,20.415 23.825,19.756 U62.47@23.006,19.756
  Bottom Copper w0.27: J14.11@5.23,12.69 5.444,12.904 5.444,13.444 6.687,14.687 6.687,15.486 6.813,15.613 6.813,15.626 7.374,16.187 8.166,16.187 8.727,15.626 8.727,13.648 9.123,13.251 9.123,12.493 10.453,11.163 10.453,10.756 10.611,10.598 13.654,10.598 16.647,13.591 16.647,15.826 17.674,16.853 19.265,16.853 20.456,15.662 20.456,15.423 20.779,15.1 v1(20.8,15.1)
S15: J14.13 U61.39 U61.46 U62.39 U62.46 | length 56.8
  Top Copper w0.27: v1(19.1,15.1) 20,15.1 20.111,14.989 20.235,14.865 ; U61.46@23,6.75 23.683,6.75 23.771,6.838 23.846,6.838 24.087,7.079 24.087,9.921 23.763,10.244 22.323,10.244 22.311,10.256 22.175,10.256 21.516,10.915 21.516,11.585 21.99,12.059 22.842,12.059 23,12.217 23,13.189 22.842,13.347 22.635,13.347 21.841,14.141 20.964,14.141 20.238,14.867 20.238,14.989 20.238,15.333 20.964,16.059 21.841,16.059 22.635,16.853 22.986,16.853 23.144,17.011 23.144,17.957 22.66,18.441 21.99,18.441 21.516,18.915 21.516,19.585 22.093,20.162 22.216,20.162 22.229,20.162 22.317,20.25 23.683,20.25 23.771,20.338 23.846,20.338 24.087,20.579 24.087,23.421 23.763,23.744 23.006,23.744 U62.39@23,23.75
  Bottom Copper w0.27: J14.13@5.23,10.15 5.308,10.228 6.167,10.228 6.374,10.435 6.374,11.339 6.558,11.523 8.311,11.523 9.152,10.682 9.152,9.948 9.748,9.352 18.552,9.352 21.3,12.1 21.3,13.045 21.142,13.203 20.188,13.203 19.25,14.141 18.564,14.141 17.838,14.867 17.838,15.333 18.167,15.662 18.633,15.662 18.962,15.333 18.962,15.327 19.1,15.189 v1(19.1,15.1)
S16: J14.15 U61.40 U61.45 U62.40 U62.45 | length 57.4
  Top Copper w0.27: 22.154,20.756 21.949,20.756 21.907,20.798 21.132,21.573 21.132,22.839 21.544,23.25 U62.40@23,23.25 ; U61.45@23,7.25 22.994,7.256 21.824,7.256 21.138,7.942 21.138,9.333 21.555,9.75 22,9.75 ; U61.40@23,9.75 22,9.75 ; U62.45@23,20.75 22.317,20.75 22.229,20.662 22.154,20.662 22.051,20.559 21.928,20.559 21.119,19.75 21.119,18.75 21.825,18.044 22.456,18.044 22.7,17.8 22.7,17.479 21.677,16.456 20.8,16.456 20.006,15.662 18.867,15.662 18.538,15.333 18.538,15.327 18.4,15.189 18.4,15.011 18.538,14.873 18.538,14.867 18.867,14.538 20.001,14.538 20.795,13.744 21.656,13.744 22.562,12.838 22.562,12.614 22.404,12.456 21.825,12.456 21.119,11.75 21.119,10.75 22,9.869 22,9.75
  Bottom Copper w0.27: J14.15@5.23,7.61 5.9,8.28 5.9,9.4 6.813,10.313 6.813,10.546 7.374,11.107 8.166,11.107 8.755,10.518 8.755,9.784 9.584,8.955 18.716,8.955 21.701,11.94 21.701,13.299 21.4,13.6 20.382,13.6 19.444,14.538 18.867,14.538 18.538,14.867 18.538,14.873 18.4,15.011 v1(18.4,15.1)
"SERIAL SEL": R202.1 U21.6 | length 3.5
  Top Copper w0.27: R202.1@46.4,43.7 46.5,43.7 47.026,43.174 47.296,43.174 48.39,42.08 48.39,41.26 U21.6@48.4,41.25
SPI1_CE0: J11.12 U62.17 | length 40.8
  Top Copper w0.27: U62.17@31.2,21.25 31.883,21.25 31.971,21.162 32.046,21.162 32.437,20.771 32.437,20.463 v1(32.5,20.4)
  Bottom Copper w0.27: J11.12@25.54,56 26.7,54.84 26.7,25.4 31.7,20.4 v1(32.5,20.4)
SPI1_CE1: J11.11 U61.17 | length 51.4
  Top Copper w0.27: U61.17@31.2,7.75 31.206,7.744 32.166,7.744 32.411,7.5 v1(32.5,7.5)
  Bottom Copper w0.27: J11.11@25.54,53.46 25.54,53.353 26.303,52.59 26.303,25.236 32.865,18.674 32.865,15.73 33.262,15.333 33.262,13.88 31.938,12.556 31.938,8.017 32.455,7.5 v1(32.5,7.5)
STBY: R201.1 U21.7 | length 5
  Top Copper w0.27: R201.1@44.4,43.7 44.5,43.7 45.423,42.777 47.132,42.777 47.89,42.019 47.89,41.26 U21.7@47.9,41.25
V1: C305.2 R303.2 U21.49 | length 23.7
  Top Copper w0.27: U21.49@52.675,31.975 v1(54.338,31.975) ; R303.2@57.375,16.1 57.4,16.1 58.237,15.263 ; C305.2@57.38,14.1 57.388,14.1 57.513,14.225 57.513,14.54 58.237,15.263 ; v1(58.8,15.1) 58.737,15.163 58.337,15.163 58.237,15.263
  Bottom Copper w0.27: v1(54.338,31.975) 55.2,31.113 55.2,28.839 58.6,25.439 58.6,15.389 58.8,15.189 v1(58.8,15.1)
V2: C308.2 R304.2 U21.51 | length 31.1
  Top Copper w0.27: U21.51@52.675,32.975 v1(54.338,32.975) ; R304.2@57.375,10.1 57.4,10.1 58.237,9.263 ; C308.2@57.38,8.1 57.388,8.1 57.513,8.225 57.513,8.54 58.237,9.263 ; v1(58.7,9.2) 58.637,9.263 58.237,9.263
  Bottom Copper w0.27: v1(54.338,32.975) 54.275,32.912 54.275,32.707 53.776,32.208 53.776,31.742 54.803,30.715 54.803,28.674 58.18,25.297 58.18,9.453 58.371,9.263 58.637,9.263 v1(58.7,9.2)
VDD: C204.2 C205.2 C402.1 C403.2 C501.1 C503.2 C504.2 C513.1 C514.1 C601.1 C602.2 C603.1 C604.2 D41.1 IC51.2 IC52.3 J21.1 L301.2 Q41.2 R201.2 R202.2 R204.1 R507.2 U51.5 U61.13 U61.14 U62.13 U62.14 | length 0
  other v1: 32.5,5.2 34.5,6.5 40,10 70,10 80,10 18.1,11.5 52.5,11.8 70,14.6 71.9,14.6 71.816,18.132 32,18.5 84.4,18.8 40,20 50,20 60,20 34.5,20.1 77.5,21.7 43.4,25.7 51.4,25.9 10,30 20,30 30,30 40,30 70,30 80,30 37.3,37.4 10,40 20,40 30,40 78.3,40.2 78.5,42.6 23.7,43.3 15.3,43.4 18.7,45.5 46.8,46.1 10,50 20,50 30,50 40,50 50,50 60,50 70,50 80,50
VDRIVE: C204.1 U21.23 | length 3.7
  Top Copper w0.27: C204.1@38.06,36.7 40.147,36.7 40.372,36.475 U21.23@41.625,36.475

## Polygon pours and split planes (outlines as drawn)
VDD on Top Copper "VDD_L01_P001" (solid, pour order 1): 86.8,4 85.5,3 3.101,2.9 3,58.1 86.499,58.1
VDD on Bottom Copper "VDD_L04_P004" (solid, pour order 4): 85.5,3 3.101,2.889 3,58.1 86.499,58.1 86.8,4
GND on Signal Layer 1 "GND_L02_P002" (solid, pour order 2): 3,58.1 86.494,58.1 86.494,57.3 86.8,4 85.5,3 3.101,2.898
GND on Signal Layer 2 "GND_L03_P003" (solid, pour order 3): 85.5,3 3.101,2.905 3,58.1 86.499,58.1 86.8,4

## Silkscreen, mask and mechanical layers (free items; w line width, h text height)
Top Overlay:
  drawing of 66 lines, arcs and shapes, not listed
  text "EXT_ / INPUT" at 3,51.5 h1.3
  text "Wave_Gen." at 63.95,50.567 h1.3
  text "ADC_AD7606" at 35.331,50.407 h1.3
  text "-" at 7.5,45.4 h1
  text "+" at 4.983,45.333 h1
  text "+10v" at 30.75,42.95 h0.7 r90
  text "V8" at 54.55,40.35 h0.7
  text "G" at 61.65,40.35 h0.7
  text "-" at 8.3,38.7 h1
  text "+5v" at 31,37.9 h0.7 r90
  text "V7" at 54.55,37.85 h0.7
  text "G" at 61.65,37.85 h0.7
  text "+5v_Reg." at 11.351,36.901 h1.3
  text "Range" at 30.3,36.4 h0.7
  text "V6" at 54.608,35.341 h0.7
  text "G" at 61.65,35.25 h0.7
  text "V5" at 54.608,32.741 h0.7
  text "G" at 61.65,32.75 h0.7
  text "+" at 8.2,32.233 h1
  text "Ext_ / Input" at 16.7,30.9 h1
  text "WG_ / Input" at 28.4,30.9 h1
  text "V4" at 54.608,30.241 h0.7
  text "G" at 61.677,30.185 h0.7
  text "MUX_16_elec." at 3.4,28.5 h1.3
  text "Cur_Sense" at 64.191,27.271 h1.3
  text "9" at 10.649,25.001 h1.52 r90
  text "8" at 12.113,25.005 h1.52 r90
  text "7" at 12.156,22.601 h1.52 r90
  text "10" at 10.644,22.303 h1.52 r90
  text "6" at 12.05,20.25 h0.7 r90
  text "11" at 10.649,19.897 h1.52 r90
  text "5" at 12.05,17.65 h0.7 r90
  text "12" at 10.615,17.237 h1.52 r90
  text "Sin." at 36.5,15.4 h1 r270
  text "Dif." at 33.7,15.3 h1 r270
  text "4" at 12.05,14.95 h0.7 r90
  text "13" at 10.654,14.503 h1.52 r90
  text "3" at 12.05,12.35 h0.7 r90
  text "14" at 10.652,11.9 h1.52 r90
  text "2" at 12.05,9.75 h0.7 r90
  text "15" at 10.656,9.4 h1.52 r90
  text "EIT-RPi Shield" at 68.516,8.289 h2
  text "1" at 12.05,7.45 h0.7 r90
  text "16" at 10.55,7.15 h0.7 r90
  text "V1.0 | 07-2024" at 73.548,4.264 h1.52
  text "Phase_Ampl_Detec" at 41.75,3.383 h1.3
Bottom Overlay:
  lines w0.254: 11.271,48.115 63,48.115 ; 14.071,45.515 14.071,50.715 ; 16.771,45.515 16.771,50.715 ; 19.271,45.515 19.271,50.615 ; 21.871,45.615 21.871,50.715 ; 24.109,45.503 24.109,50.603 ; 27.083,45.621 27.083,50.721 ; 29.371,45.515 29.371,50.715 ; 32.071,45.615 32.071,50.715 ; 34.571,45.515 34.571,50.715 ; 37.133,45.444 37.133,50.644 ; 39.671,45.515 39.671,50.515 ; 42.351,45.541 42.351,50.541 ; 44.771,45.615 44.771,50.515 ; 47.271,45.515 47.271,50.515 ; 49.859,45.515 49.859,50.515 ; 52.386,45.525 52.386,50.525 ; 54.696,45.623 54.696,50.523 ; 57.461,45.53 57.461,50.53 ; 60.262,45.525 60.262,50.525
  text "MUX_D / WG_D" at 60.071,54.401 h0.7 r90
  text "WG_CLK / MUX_CLK" at 63.3,53.965 h0.7 r90
  text "MUX_I / CE0" at 26.766,53.724 h0.7 r90
  text "WG / CE2" at 57.214,53.728 h0.7 r90
  text "ADC / CS0" at 42.1,53.265 h0.7 r90
  text "GND" at 18.421,50.465 h0.7 r90
  text "GND" at 28.421,50.465 h0.7 r90
  text "GND" at 36.221,50.465 h0.7 r90
  text "GND" at 48.921,50.465 h0.7 r90
  text "GND" at 53.982,50.295 h0.7 r90
  text "5v" at 13.021,49.765 h0.7 r90
  text "5v" at 15.721,49.765 h0.7 r90
  text "ADC / RESET" at 49.629,47.925 h0.7 r90
  text "ADC / CONV" at 52.223,47.934 h0.7 r90
  text "MUX_O / CE1" at 26.712,47.915 h0.7 r90
  text "ADC / SCLK" at 42.171,47.894 h0.7 r90
  text "ADC / BUSY" at 31.8,47.8 h0.7 r90
  text "GND" at 43.836,47.777 h0.7 r90
  text "GND" at 61.923,47.737 h0.7 r90
  text "3v3" at 13.021,47.565 h0.7 r90
  text "GND" at 23.421,47.565 h0.7 r90
  text "3v3" at 33.621,47.565 h0.7 r90
  text "DA" at 36.221,47.565 h0.7 r90
  text "DB" at 38.821,47.565 h0.7 r90
Mechanical 1:
  lines w0.254: 2.4,3.9 ccw(c3.8,3.9) 3.8,2.5 86,2.5 ccw(c86,4) 87.5,4 87.5,57 ccw(c86,57) 86,58.5 3.9,58.5 3.8,58.5 ccw(c3.8,57.1) 2.4,57.1 2.4,3.9